# Altium PCB COMBINED.PcbDoc (part 3 of 3)
Units mil, origin at the board's own origin, x right, y up, seen from the top; angles counter-clockwise.
Board outline 6800 x 2100 mil, 4 copper layers (Top Layer, Mid-Layer 1, Mid-Layer 2, Bottom Layer); 221 components, 0 nets, 1007 pads, 208 vias.
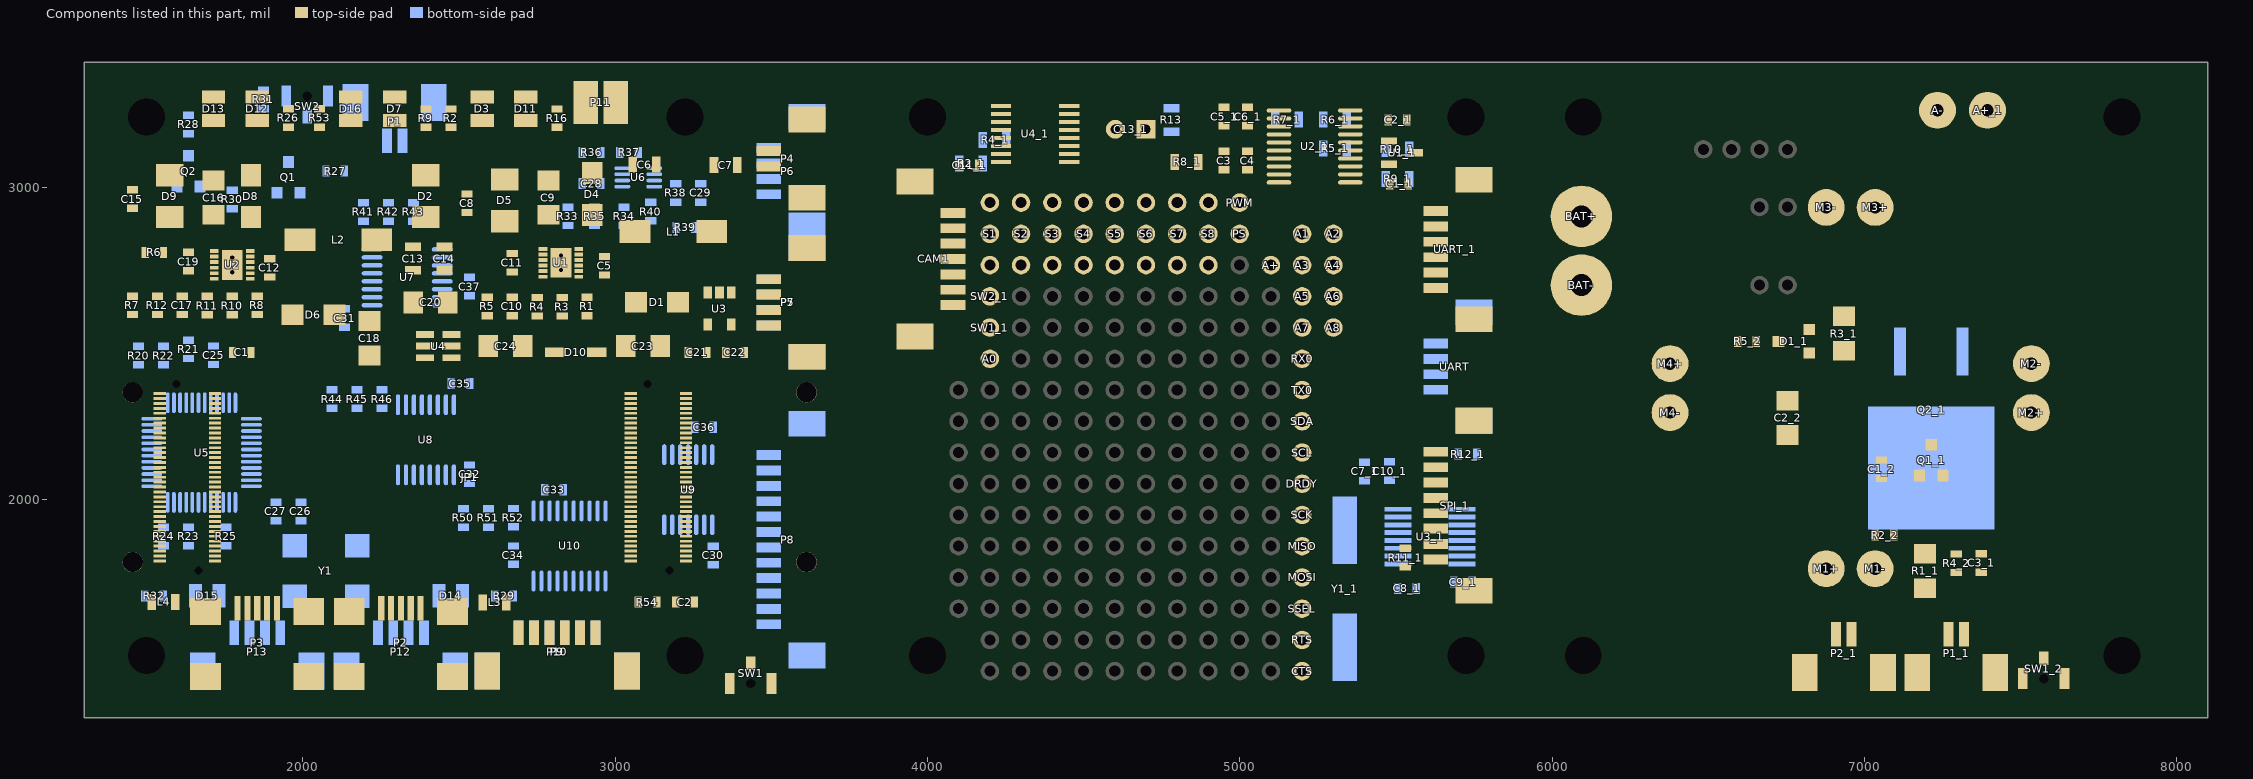
[diagram p5: the components of this part, seen from the top]

## Polygon pours and split planes (outlines as drawn) (continued)
no net on Mid-Layer 1 "+3V3" (solid, pour order 1001): 4230,2380 4230,2120 4070,2120 4070,2340.43 4070,2380
no net on Mid-Layer 1 "GND" (solid, remove dead copper, pour order 1006): 1374.33,3229.13 1494.33,3350 1499.33,3344.96 3579.33,3344.96 3579.33,3329.86 3694.33,3214.02 3694.33,1496.66 3689.33,1496.66 3574.33,1380.83 1489.33,1380.83 1489.33,1385.86 1379.33,1496.66 1374.33,1501.7 1374.33,3229.13
no net on Mid-Layer 2 "GND" (solid, pour order 1003): 3966.23,3344 5741.55,3344 5766.91,3344 5843,3267.88 5843,1466.27 5756.77,1380 3986.52,1380 3880,1486.57 3880,3257.73 3966.23,3344
no net on Mid-Layer 2 "VCC_IO" (solid, remove dead copper, pour order 1000): 2484.33,1930.83 2704.33,1930.83 2714.33,1930.83 2819.33,1825.83 2834.33,1810.83 2979.33,1810.83 2984.33,1810.83 3029.33,1765.83 3054.33,1740.83 3054.33,1380.83 2604.33,1380.83 2624.33,1400.83 2624.33,1785.83 2624.33,1790.83 2569.33,1845.83 2559.33,1855.83 2504.33,1855.83 2494.33,1855.83 2474.33,1875.83 2469.33,1880.83 2469.33,1910.83 2469.33,1915.83 2484.33,1930.83
no net on Mid-Layer 2 "VCC_UART" (solid, remove dead copper, pour order 1001): 2164.33,2855.83 2144.33,2875.83 2144.33,2905.83 2149.33,2910.83 2159.33,2920.83 2159.33,2925.83 2359.33,2925.83 2399.33,2885.83 2404.33,2880.83 2609.33,2880.83 2614.33,2880.83 2664.33,2830.83 2899.33,2830.83 2999.33,2730.83 3274.33,2730.83 3284.33,2730.83 3399.33,2845.83 3399.33,3125.83 3424.33,3150.83 3529.33,3150.83 3544.33,3135.83 3554.33,3125.83 3554.33,2765.83 3669.33,2765.83 3689.33,2745.83 3689.33,2515.83 3689.33,2510.83 3679.33,2500.83 3674.33,2495.83 3474.33,2495.83 3459.33,2495.83 3444.33,2510.83 3444.33,2625.83 3444.33,2630.83 3429.33,2645.83 3379.33,2645.83 3364.33,2645.83 3309.33,2590.83 3299.33,2600.83 2389.33,2600.83 2344.33,2645.83 2334.33,2655.83 2334.33,2770.83 2319.33,2770.83 2234.33,2855.83 2164.33,2855.83
no net on Mid-Layer 2 "VCC_I2C" (solid, remove dead copper, pour order 1002): 3109.33,3130.6 3109.33,3118.37 3054.33,3073.52 3049.33,3069.44 3049.33,3020.52 3049.33,3016.44 3034.33,3004.21 2829.33,3004.21 2809.33,2987.9 2809.33,2967.52 2809.33,2959.37 2819.33,2951.21 2844.33,2930.83 3369.33,2930.83 3378.43,2930.83 3399.33,2947.87 3399.33,3109.97 3399.33,3110.21 3404.33,3114.29 3559.33,3114.29 3564.33,3110.21 3564.33,3065.37 3574.33,3057.21 3584.33,3049.06 3679.33,3049.06 3689.33,3057.21 3689.33,3146.9 3689.33,3150.98 3664.33,3171.37 3634.33,3195.83 3349.33,3195.83 3189.33,3195.83 3109.33,3130.6
no net on Mid-Layer 2 "VCC_SPI" (solid, remove dead copper, pour order 1003): 2074.33,2400.83 2484.33,2400.83 2489.33,2400.83 2504.33,2385.83 2509.33,2380.83 2509.33,2305.83 2509.33,2300.83 2534.33,2275.83 2994.33,2275.83 2999.33,2275.83 3059.33,2335.83 3659.33,2335.83 3674.33,2320.83 3689.33,2305.83 3689.33,1480.83 3689.33,1465.83 3664.33,1440.83 3564.33,1440.83 3554.33,1440.83 3334.33,1660.83 3334.33,2005.83 3334.33,2010.83 3299.33,2045.83 3184.33,2045.83 3124.33,2045.83 2989.33,2180.83 2344.33,2180.83 2209.33,2315.83 2199.33,2325.83 2074.33,2325.83 2074.33,2400.83
no net on Mid-Layer 2 "VCC_1V8" (solid, remove dead copper, pour order 1004): 1374.33,1495.83 1494.33,1375.83 3569.33,1375.83 3689.33,1495.83 3689.33,1509.96 3689.33,2640.83 3644.33,2685.83 2414.33,2685.83 2414.33,2720.83 2199.33,2935.83 2194.33,2930.83 2104.33,2930.83 2049.33,2930.83 1759.33,2640.83 1734.33,2615.83 1404.33,2615.83 1399.33,2615.83 1374.33,2590.83 1374.33,1495.83
no net on Mid-Layer 2 "VCC_3v3" (solid, remove dead copper, pour order 1005): 1494.33,3345 1374.33,3223.62 1374.33,2535.67 3689.18,2535.67 3689.33,2535.83 3689.33,3228.68 3679.33,3228.68 3564.33,3345 1494.33,3345
no net on Bottom Layer "Top_GND" (solid, pour order 1000): 7024.33,2785.83 7289.33,2785.83 7339.33,2735.83 7339.33,2380.83 7324.33,2365.83 7229.33,2365.83 7209.33,2385.83 7209.33,2570.83 7194.33,2585.83 7024.33,2585.83

## Silkscreen, mask and mechanical layers (free items; w line width, h text height)
Top Overlay:
  circle w10: c7824.41,1500 r59.06
  circle w10: c7824.41,3224.41 r59.06
  circle w10: c6100,1500 r59.06
  circle w10: c6100,3224.41 r59.06
  circle w10: c4000,3224.41 r59.06
  circle w10: c4000,1500 r59.06
  circle w10: c5724.41,3224.41 r59.06
  circle w10: c5724.41,1500 r59.06
  circle w10: c3224.41,1500 r59.06
  circle w10: c3224.41,3224.41 r59.06
  circle w10: c1500,1500 r59.06
  circle w10: c1500,3224.41 r59.06
  lines w10: 3900,1800 4250,1800 ; 3900,2100 4250,2100 ; 3900,2400 4250,2400 ; 4250,1425 4250,2700 5150,2700 5150,1425
  text "U1" at 1744.33,3155.83 h60 r180
  text "3V3" at 2629.33,3155.83 h60 r180
  text "1V8" at 2819.33,3155.83 h60 r180
  text "U2" at 1969.33,3150.83 h60 r180
  text "6V5" at 2194.33,3150.83 h60 r180
  text "5V" at 2374.33,3150.83 h60 r180
  text "+3V3" at 3900,2330 h40
  text "+5V" at 3900,2030 h40
  text "Quadrotor Power" at 6019.33,1820.83 h40
  text "2009/06" at 6374.33,1760.83 h32
  text "GND" at 3900,1730 h40
Bottom Overlay:
  text "Quadrotor Expansion" at 3970,2370 h40 r90
  text "2009/06" at 4030,1845 h32 r90
  text "HOST" at 1749.33,1555.83 h60
  text "OTG" at 2209.33,1550.83 h60
Mechanical 1:
  lines w10: 1500,1377.95 cw(c1500,1500) 1377.95,1500 1377.95,3224.41 cw(c1500,3224.41) 1500,3346.46 ; 1500.08,1378.03 3568.9,1378.03 ; 1500.08,3346.54 3568.9,3346.54 ; 3568.9,1377.95 ccw(c3568.9,1500) 3690.95,1500 3690.95,3224.41 ccw(c3568.9,3224.41) 3568.9,3346.46 ; 4000,1377.95 cw(c4000,1500) 3877.95,1500 3877.95,3224.41 cw(c4000,3224.41) 4000,3346.46 ; 4000.08,1378.03 5724.41,1378.03 ; 4000.08,3346.54 5724.41,3346.54 ; 5724.41,3346.46 cw(c5724.41,3224.41) 5846.46,3224.41 ; 5724.49,1377.8 ccw(c5724.41,1499.92) 5846.54,1500 5846.54,3224.33 ; 6100,1377.95 cw(c6100,1500) 5977.95,1500 5977.95,3224.41 cw(c6100,3224.41) 6100,3346.46 ; 6100.08,1378.03 7824.41,1378.03 ; 6100.08,3346.54 7824.41,3346.54 ; 7824.41,3346.46 cw(c7824.41,3224.41) 7946.46,3224.41 ; 7824.49,1377.8 ccw(c7824.41,1499.92) 7946.54,1500 7946.54,3224.33 ; 1300,1300 8100,1300 8100,3400 1300,3400 1300,1300

## Text inside footprints (layer, text, board x,y; h text height)
CAM1: Top Overlay "7" at 4063.35,2590.47 h39.37 r270; Top Overlay "1" at 4063.35,2963.5 h39.37 r270
P1: Bottom Overlay "2" at 2351.42,3172.4 h39.37 r180; Bottom Overlay "1" at 2217.56,3170.43 h39.37 r180
P1_1: Top Overlay "2" at 7351.42,1544.25 h39.37; Top Overlay "1" at 7217.56,1546.22 h39.37
P2_1: Top Overlay "2" at 6991.42,1544.25 h39.37; Top Overlay "1" at 6857.56,1546.22 h39.37
P4: Top Overlay "1" at 3513.94,3014.06 h39.37 r90; Top Overlay "2" at 3515.91,3147.91 h39.37 r90
P5: Top Overlay "4" at 3512.95,2734.17 h39.37 r90; Top Overlay "1" at 3512.95,2508.78 h39.37 r90
P6: Bottom Overlay "1" at 3512.95,3172.87 h39.37 r90; Bottom Overlay "4" at 3512.95,2947.48 h39.37 r90
P7: Bottom Overlay "1" at 3512.95,2752.87 h39.37 r90; Bottom Overlay "4" at 3512.95,2527.48 h39.37 r90
P8: Bottom Overlay "1" at 3510.98,2187.76 h39.37 r90; Bottom Overlay "12" at 3510.98,1568.66 h39.37 r90
P9: Top Overlay "6" at 2968.86,1554.17 h39.37; Top Overlay "1" at 2645.04,1554.17 h39.37
P10: Bottom Overlay "6" at 2659.8,1554.17 h39.37; Bottom Overlay "1" at 2983.62,1554.17 h39.37
P12: Bottom Overlay "1" at 2409.33,1470.83 h39.37; Bottom Overlay "4" at 2254.33,1475.83 h39.37
P13: Bottom Overlay "1" at 1944.33,1475.83 h39.37; Bottom Overlay "4" at 1794.33,1480.83 h39.37
SPI_1: Top Overlay "8" at 5646.65,2183.74 h39.37 r90; Top Overlay "1" at 5646.65,1761.5 h39.37 r90
UART: Bottom Overlay "4" at 5648.62,2321.65 h39.37 r90; Bottom Overlay "1" at 5648.62,2547.05 h39.37 r90
UART_1: Top Overlay "1" at 5646.65,2630.71 h39.37 r90; Top Overlay "6" at 5646.65,2954.53 h39.37 r90